# Altium PCB l2-l3-hind.PcbDoc
Units mm, origin at the board's own origin, x right, y up, seen from the top; angles counter-clockwise.
Board outline 77.5 x 14.75 mm, 2 copper layers (Top Layer, Bottom Layer); 15 components, 19 nets, 77 pads, 45 vias.
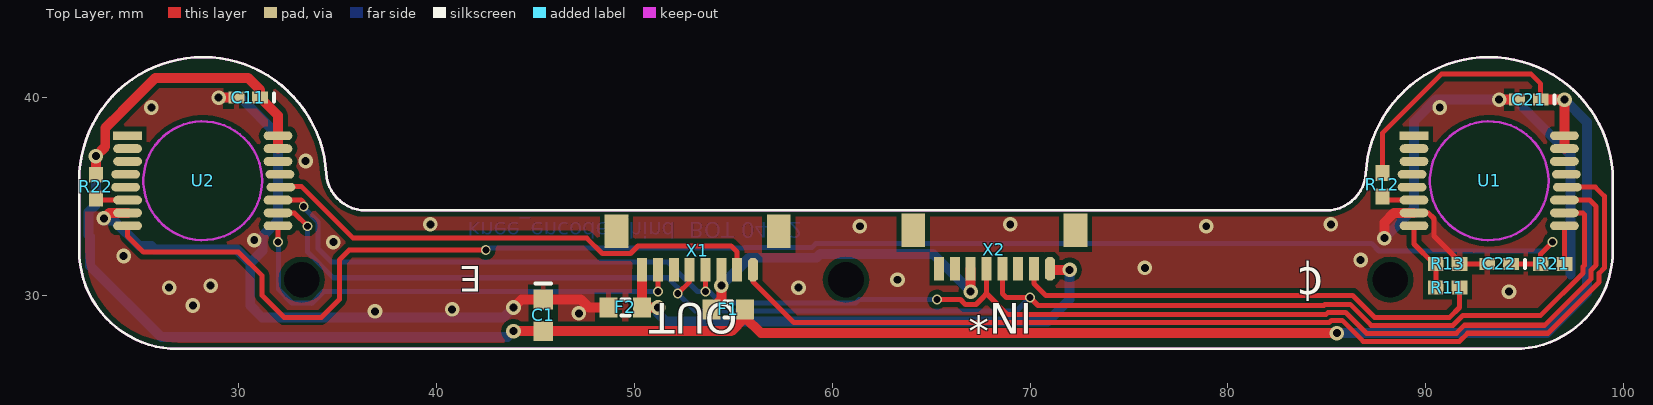
[diagram p0: Top Layer view]
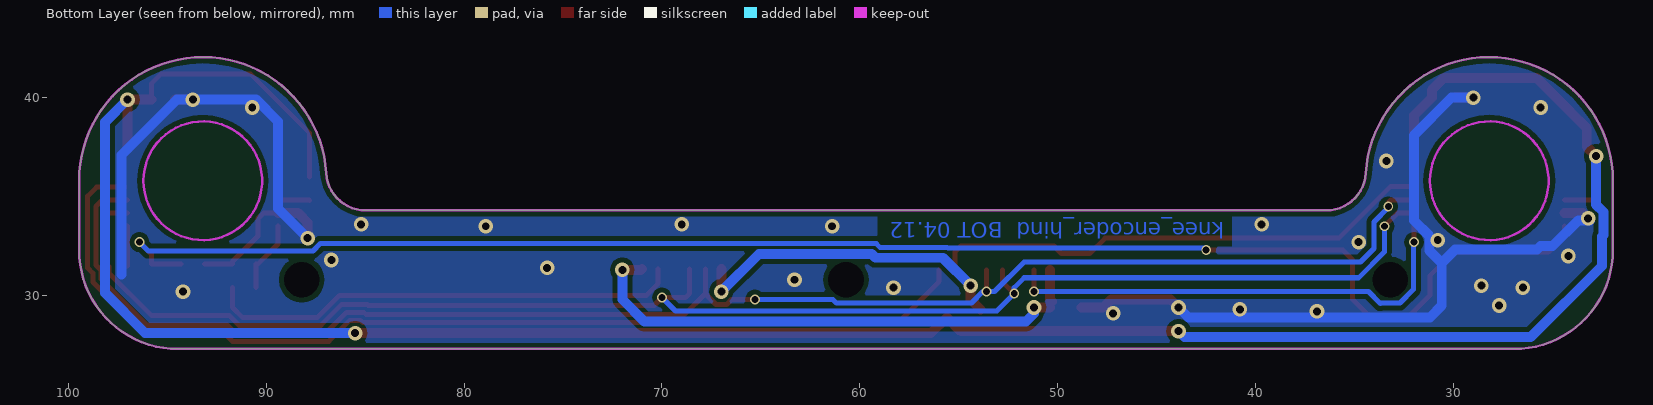
[diagram p1: Bottom Layer view, seen from below]

## Layer stack, top to bottom
Top Solder: solder mask 0.0102, Solder Resist, Dk 3.5
Top Layer: signal copper 0.0356
Dielectric1: dielectric 0.32, FR-4, Dk 4.8
Bottom Layer: signal copper 0.0356
Bottom Solder: solder mask 0.0102, Solder Resist, Dk 3.5

## Board outline
26.95,27.3 cw(c26.95,32.3) 21.95,32.3 21.95,35.8 cw(c28.2,35.8) 34.439,36.179 ccw(c36.435,36.3) 36.435,34.3 84.965,34.3 ccw(c84.965,36.3) 86.962,36.179 cw(c93.2,35.8) 99.45,35.8 99.45,32.3 cw(c94.45,32.3) 94.45,27.3

## Design rules (kind name [scope] priority, off if disabled: settings)
Clearance Clearance_Polygons [InPolygon] p1: gap=0.254
Clearance [All] p2: gap=0.15
HoleSize [All] p1: absolutevalues=TRUE maxlimit=6.2 minlimit=0.35 maxpercent=80.000 minpercent=20.000
MinimumSolderMaskSliver [All] p1: minsoldermaskwidth=0.15
PolygonConnect PolygonConnect_via [All vs IsVia] p1: connectstyle=Direct reliefconductorwidth=0.254 reliefentries=4 polygonreliefangle="90 Angle" airgapwidth=0.254
PolygonConnect [All] p2: connectstyle=Relief reliefconductorwidth=0.254 reliefentries=4 polygonreliefangle="90 Angle" airgapwidth=0.254
RoutingVias [All] p1: holewidth=0.5 width=0.8 viastyle="Through Hole" minholewidth=0.35 minwidth=0.5 maxholewidth=1.5 maxwidth=2
SilkToSilkClearance [All] p1 off: silktosilkclearance=0.254
SilkToSolderMaskClearance SilkscreenOverComponentPads [IsPad] p1 off: minsilkscreentomaskgap=0.254 clearancetoexposedcopper=TRUE
SolderMaskExpansion [All] p1: expansion=0
Width [All] p1: maxlimit=5 minlimit=0.15 preferedwidth=0.5
25 further rules are at their usual default settings.

## Components (designator, comment, footprint, x,y, rotation, side; value= is the part's Value field where it differs from the comment)
C1 "10uF" CAPC1608N 45.4,29 r270 top
C11 "100nF" CAPC1005N 30.5,40 r180 top
C21 "100nF" CAPC1005N 95.2,39.9 r180 top
C22 "1nF" CAPC1005N 93.7,31.6 r180 top
F1 "50mA, 1.5R" RESC1608N 54.75,29.3 r0 top
F2 "50mA, 1.5R" RESC1608N 49.55,29.4 r180 top
R11 "xR" RESC1005N 91.1,30.4 r180 top
R12 "xR" RESC1005N 87.8,35.6 r270 top
R13 "0R" RESC1005N 91.1,31.6 r180 top
R21 "100R" RESC1005N 96.4,31.6 r180 top
R22 "xR" RESC1005N 22.8,35.5 r270 top
U1 "AS5045" SSOP16 93.2,35.8 r0 top
U2 "AS5045" SSOP16 28.2,35.8 r0 top
X1 "SM08B-SURS" SM08B-SURS 53.2,31.3 r270 top
X2 "SM08B-SURS" SM08B-SURS 68.2,31.35 r270 top

## Footprints (in the part's own frame and the unit in brackets; to place one, negate y for a bottom-side part, rotate by r counter-clockwise, add the part's x,y. Pads: shape width x height; smd on the part's side, far side on the other; paste and mask are expansions set on the pad)
CAPC1005N [mm] "Chip Capacitor, Body 1.0x0.5mm, IPC Medium Density"
  rect 0.8x0.6 smd: 1(-0.6,0) 2(0.6,0)
  silkscreen extent -1.3,-0.2 -1.3,0.2, body extent -0.55,-0.3 0.55,0.3, height 0.6
CAPC1608N [mm] "Chip Capacitor, Body 1.6x0.8mm, IPC Medium Density"
  rect 1x1 smd: 1(-0.8,0) 2(0.8,0)
  silkscreen extent -1.6,-0.4 -1.6,0.4, body extent -0.87,-0.48 0.87,0.48, height 0.85
RESC1005N [mm] "Chip Resistor, Body 1.1x0.5mm, IPC Medium Density"
  rect 0.8x0.7 smd: 1(-0.6,0) 2(0.6,0)
  body extent -0.55,-0.3 0.55,0.3, height 0.4
RESC1608N [mm] "Chip Resistor, Body 1.6x0.8mm, IPC Medium Density"
  rect 0.9x1 smd: 1(-0.85,0) 2(0.85,0)
  silkscreen extent -0.2,-0.4 0.2,0.4, body extent -0.85,-0.48 0.85,0.48, height 0.6
SM08B-SURS [mm] "Wire-to-board connector, 8 pins, Body 8.6x2.7mm, Pitch 0.8mm, IPC Low Density"
  oct 1.2x0.5 smd: 1(0,2.8)
  rect 1.2x0.5 smd: 2(0,2) 3(0,1.2) 4(0,0.4) 5(0,-0.4) 6(0,-1.2) 7(0,-2) 8(0,-2.8)
  rect 1.7x1.2 smd: A(-1.95,4.1) B(-1.95,-4.1)
  body extent -2.45,-4.3 0.25,4.3, height 1.7
SSOP16 [mm] "16-Pin Shrink Small-Outline Package, Body 7.8x6.2mm, 0.65 mm Pitch, IPC Medium Density"
  rect 1.45x0.44 smd: 1(-3.8,2.275)
  oval 1.45x0.44 smd: 2(-3.8,1.625) 3(-3.8,0.975) 4(-3.9,0.325) 5(-3.9,-0.325) 6(-3.8,-0.975) 7(-3.8,-1.625) 8(-3.8,-2.275) 9(3.8,-2.275) 10(3.8,-1.625) 11(3.8,-0.975) 12(3.95,-0.325) 13(3.9,0.325) 14(3.8,0.975) 15(3.8,1.625) 16(3.8,2.275)
  body extent -2.8,-3.25 2.8,3.25, height 2

## Part data
C1 C11 C21 C22: library part Cap, "Capacitor"
F1 F2: library part "Fuse 1", "Ferrit Bead"
R11 R12 R13 R21 R22: library part Res1, "Resistor"
U1 U2: "12 Bit Programmable Magnetic Rotary Encoder"
X1 X2: "wire-to-board connector"

## Free pads (board coordinates)
  round 0 hole 1.8: 0(33.2,30.8) 0(60.7,30.8) 0(88.2,30.8)

## Via types
v1: diameter 0.74, hole 0.4, Top Layer to Bottom Layer, tented both sides, 35 vias
v2: diameter 0.5, hole 0.35, Top Layer to Bottom Layer, tented both sides, 10 vias

## Nets (pads, with @x,y where several pads share a name; then routed paths per layer and width w, separated by ;. In a path a pad name is that pad's centre, name@x,y a point inside that pad or via, vN(x,y) a via of type N, cw(c..) or ccw(c..) an arc to the next point about the centre after c; other vN are vias at no path point)
3.3V: C1.2 C11.1 C21.1 F1.2 R12.1 R22.1 U1.15 U1.16 U2.15 U2.16 | length 125.8
  Top Layer w0.254: R12.1@87.8,36 87.8,38.2 90.8,41.2 95.3,41.2 95.8,40.7 C21.1
  Top Layer w0.5: R22.1 v1(22.8,37.043) 23.275,37.518 23.275,38.461 24.114,39.3 24.114,39.314 25.8,41 30.5,41 31.1,40.4 C11.1 32,39.1 U2.16 U2.15 ; v1(43.9,28.2) C1.2 54.9,28.2 55.6,28.9 56.4,28.1 v1(85.5,28.1) ; C21.1 v1(97,39.9) U1.16 U1.15
  Bottom Layer w0.5: v1(22.8,37.043) 22.8,34.589 22.43,34.219 22.43,33.051 22.504,32.977 22.504,31.496 26.1,27.9 43.6,27.9 v1(43.9,28.2) ; v1@85.5,28.112 96.112,28.112 98.13,30.13 98.13,38.77 v1(97,39.9)
C\S\: U1.11 U2.11 X1.4 X2.5 | length 79.9
  Top Layer w0.254: U2.11 33.175,34.825 33.3,34.7 v2(33.3,34.5) ; v2(53.6,30.2) X1.4 ; v2(65.3,29.8) 66.485,29.8 66.732,29.553 67.268,29.553 67.647,29.932 67.647,29.947 67.8,30.1 ; X2.5 67.8,30.1 ; U1.11 98.275,34.825 98.6,34.5 98.6,31.546 98.348,31.294 98.348,30.848 96,28.5 91.943,28.5 91.535,28.092 86.994,28.092 85.935,29.151 85.065,29.151 84.945,29.031 68.869,29.031 67.8,30.1
  Bottom Layer w0.254: v2@33.4,34.4 v2(33.3,34.5) 33.3,34.445 34.027,33.718 34.027,32.373 34.7,31.7 51.7,31.7 53.2,30.2 v2(53.6,30.2) 53.785,30.2 54.362,29.623 61.188,29.623 61.369,29.804 65.296,29.804 v2(65.3,29.8)
DI: R11.1 X2.2 | length 24.2
  Top Layer w0.254: X2.2 70.2,30.6 70.8,30 86.3,30 87.4,28.9 91.2,28.9 91.7,29.4 R11.1
DO: U2.9 X1.7 | length 24
  Top Layer w0.254: v2(32,32.7) U2.9 ; v2(51.2,30.2) X1.7
  Bottom Layer w0.254: v2(32,32.7) 32.023,32.677 32.023,30.312 32.712,29.623 33.677,29.623 33.7,29.6 34.3,30.2 v2(51.2,30.2)
DO1: R21.1 U1.9 | length 2
  Top Layer w0.254: R21.1@97,31.5 U1.9
GND: C1.1 C11.2 C21.2 C22.2 F2.2 R13.1 U1.7 U2.7 | length 73.5
  Top Layer w0.254: U1.7 90.125,34.175 90.409,33.891 90.409,33.009 91.7,31.718 R13.1 C22.2
  Top Layer w0.5: v1(23.2,33.9) 23.475,34.175 U2.7 ; v1(29,40) C11.2 ; v1(43.9,29.4) 44.3,29.8 C1.1 47.3,29.8 47.7,29.4 F2.2@48.8,29.4 ; v1(87.9,32.9) 87.9,33.7 88.375,34.175 U1.7 ; v1(93.7,39.9) C21.2
  Bottom Layer w0.5: v1(23.2,33.9) 23.1,33.8 23.7,33.8 25,32.5 25.6,32.5 25.78,32.32 29.92,32.32 30.6,31.64 ; v1(29,40) 30.1,40 32,38.1 32,33.789 31.23,33.019 31.23,32.27 30.6,31.64 ; v1(43.9,29.4) 43.4,28.9 31.2,28.9 30.6,29.5 30.6,31.64 ; v1(87.9,32.9) 89.4,34.4 89.4,38.8 90.5,39.9 v1(93.7,39.9) 94.5,39.9 97.3,37.1 97.3,31.062
  other v1: 47.2,29.1 36.9,29.2 40.8,29.3 27.7,29.5 94.2,30.2 26.5,30.4 58.3,30.4 28.6,30.5 63.3,30.8 75.8,31.4 86.7,31.8 24.2,32 34.8,32.7 30.8,32.8 61.4,33.5 78.9,33.5 39.7,33.6 69,33.6 85.2,33.6 33.4,36.8 25.6,39.5 90.7,39.5
M\A\G\D\E\C\1\: U1.2
M\A\G\D\E\C\2\: U2.2
M\A\G\I\N\C\1\: U1.1
M\A\G\I\N\C\2\: U2.1
MODE1: R12.2 U1.6 | length 1.6
  Top Layer w0.254: R12.2@87.8,34.8 87.825,34.825 U1.6
MODE2: R22.2 U2.6 | length 1.6
  Top Layer w0.254: R22.2 22.875,34.825 U2.6
PROG_DI1: R11.2 R13.2 U1.8 | length 3.8
  Top Layer w0.254: U1.8 89.4,32.6 R13.2@90.4,31.6 ; R11.2 R13.2 R13.2@90.4,31.6 ; R13.2@90.5,31.5 R13.2@90.4,31.6
PROG_DI2: C22.1 R21.2 U2.8 | length 80.7
  Top Layer w0.254: U2.8 24.4,33 25.2,32.2 30,32.2 31.2,31 31.2,30 32.3,28.9 34.2,28.9 35.1,29.8 35.1,31.8 35.6,32.3 v2(42.5,32.3) ; C22.1 R21.2 95.8,32.1 v2(96.4,32.7)
  Bottom Layer w0.254: v2@42.5,32.4 55.555,32.4 55.59,32.435 58.989,32.435 59.151,32.597 59.151,32.627 87.258,32.627 87.632,32.253 95.953,32.253 v2(96.4,32.7)
PWM1: U1.12 X1.1 | length 52.4
  Top Layer w0.254: X1.1 56,30.7 58.073,28.627 85.112,28.627 85.232,28.747 85.768,28.747 86.827,27.688 91.702,27.688 92.11,28.096 96.167,28.096 98.752,30.681 98.752,31.127 99.017,31.392 99.017,35.017 98.559,35.475 U1.12
PWM2: U2.12 X1.2 | length 25.5
  Top Layer w0.254: U2.12@32.3,35.5 33.2,35.5 35.8,32.9 47.608,32.9 48.385,32.123 49.815,32.123 50.192,32.5 54.9,32.5 55.2,32.2 X1.2
SCLK: U1.10 U2.10 X1.5 X2.4 | length 79.1
  Top Layer w0.254: U2.10 32.825,34.175 v2(33.5,33.5) ; v2(52.2,30.1) 52.8,30.7 X1.5 ; X2.4 68.6,30.1 68.8,29.9 v2(70,29.9) 70.4,29.5 84.842,29.5 84.897,29.555 86.174,29.555 87.233,28.496 91.367,28.496 91.871,29 95.8,29 97.944,31.144 97.944,31.461 98.002,31.519 98.002,34.098 97.925,34.175 U1.10
  Bottom Layer w0.254: v2(33.5,33.5) 33.5,32.2 34.8,30.9 51.7,30.9 52.2,30.4 v2(52.2,30.1) 53.081,29.219 69.319,29.219 v2(70,29.9)
VDD: F1.1 X1.3 X2.6 | length 16.6
  Top Layer w0.5: F1.1 54.4,29.8 v1(54.4,30.5) ; v1(67,30.2) X2.6
  Bottom Layer w0.5: v1(54.4,30.5) 55.808,31.908 59.207,31.908 59.399,32.1 65.1,32.1 v1(67,30.2)
VSS: F2.1 X1.8 X2.1 | length 26.7
  Top Layer w0.5: F2.1@50.3,29.7 50.4,29.8 X1.8 ; F2.1 v1(51.2,29.4) ; X2.1 71.05,31.3 v1(72,31.3)
  Bottom Layer w0.5: v1(51.2,29.4) 51.2,29.1 51.608,28.692 70.892,28.692 72,29.8 v1(72,31.3)
pads on no net: U1.3 U1.4 U1.5 U1.13 U1.14 U2.3 U2.4 U2.5 U2.13 U2.14 X1.6 X1.A X1.B X2.3 X2.7 X2.8 X2.A X2.B

## Polygon pours and split planes (outlines as drawn)
GND on Top Layer "TOPGND" (solid, remove dead copper, pour order 4): 21.4,42.408 21.4,26.685 99.769,26.685 100,26.5 99.884,26.592 99.884,42.5
GND on Bottom Layer "BOTGND" (solid, remove dead copper, pour order 3): 21.4,42.408 21.4,26.685 99.769,26.685 100,26.5 99.884,26.592 99.884,42.5

## Keep-outs
Keep-Out Layer:
  circle w0.127: c28.2,35.8 r3
  circle w0.127: c93.2,35.8 r3
  lines w0.127: 21.95,32.3 ccw(c26.95,32.3) 26.95,27.3 94.45,27.3 ccw(c94.45,32.3) 99.45,32.3 99.45,35.8 ccw(c93.2,35.8) 86.962,36.179 cw(c84.965,36.3) 84.965,34.3 36.435,34.3 cw(c36.435,36.3) 34.439,36.179 ccw(c28.2,35.8) 21.95,35.8 21.95,32.3

## Other copper
Bottom Layer:
  text "knee_encoder_hind  BOT 04.12" at 41.6,33.7 h0.8 r180

## Silkscreen, mask and mechanical layers (free items; w line width, h text height)
Top Overlay:
  the board outline again, w0.127
  text "¢" at 84.9,31.977 h3 r180
  text "E" at 42.3,31.905 h2.2 r180
  text "OUT" at 55.231,29.6 h1.52 r180
  text "IN*" at 70.104,29.6 h1.52 r180
Mechanical 1:
  circle w0.127: c28.2,35.8 r3.05
  circle w0.127: c93.2,35.8 r3.05
  lines w0.127: 21.95,32.3 ccw(c26.95,32.3) 26.95,27.3 94.45,27.3 ccw(c94.45,32.3) 99.45,32.3 99.45,35.8 ccw(c93.2,35.8) 86.962,36.179 cw(c84.965,36.3) 84.965,34.3 36.435,34.3 cw(c36.435,36.3) 34.439,36.179 ccw(c28.2,35.8) 21.95,35.8 21.95,32.3
Mechanical 3:
  circle w0.1: c88.2,30.8 r1.5
  circle w0.1: c60.7,30.8 r1.5
  circle w0.1: c33.2,30.8 r1.5

## Dimensions
21.95,35.8 to 99.45,35.8 on Mechanical 1
96.3,42 to 94.45,27.3 on Mechanical 1
33.2,30.8 to 26.95,27.3 on Mechanical 1
33.2,30.8 to 21.95,32.3 on Mechanical 1